# Altium PCB Mach_in.PcbDoc
Units mm, origin at the board's own origin, x right, y up, seen from the top; angles counter-clockwise.
Board outline 169.93 x 104.19 mm, 2 copper layers (Top Layer, Bottom Layer); 38 components, 29 nets, 150 pads, 8 vias.
Unrouted connection lines stored in the file: 5.
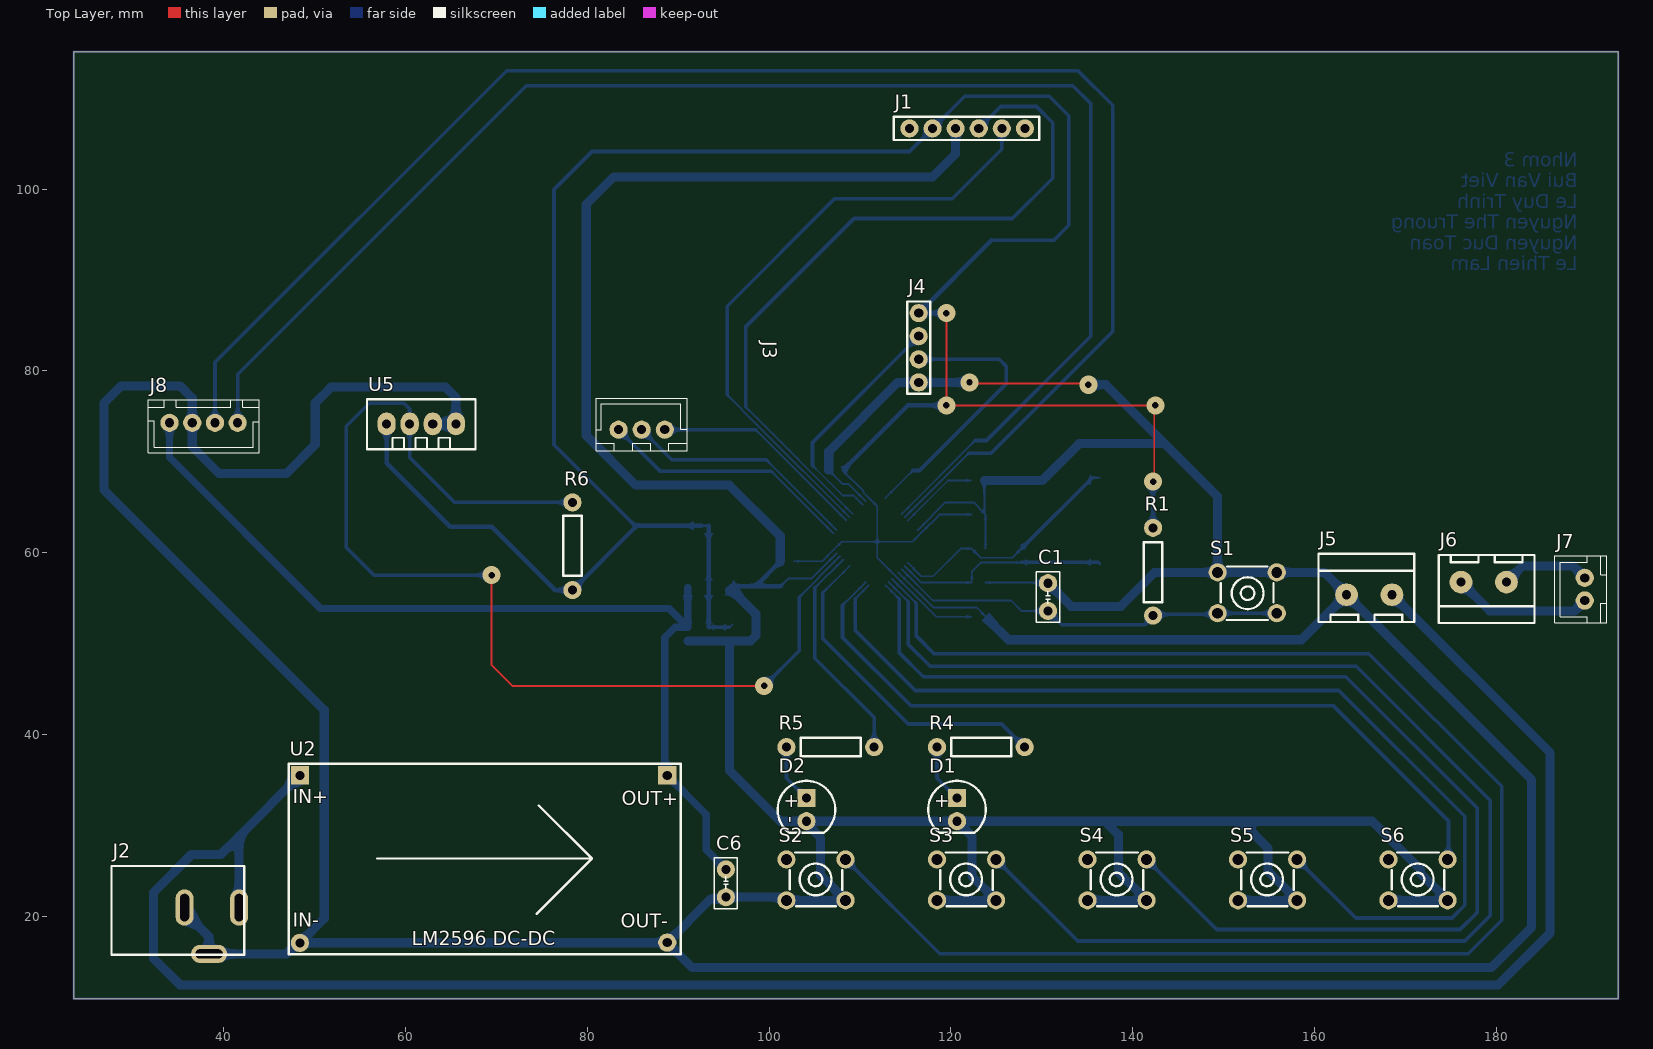
[diagram p0: Top Layer view]
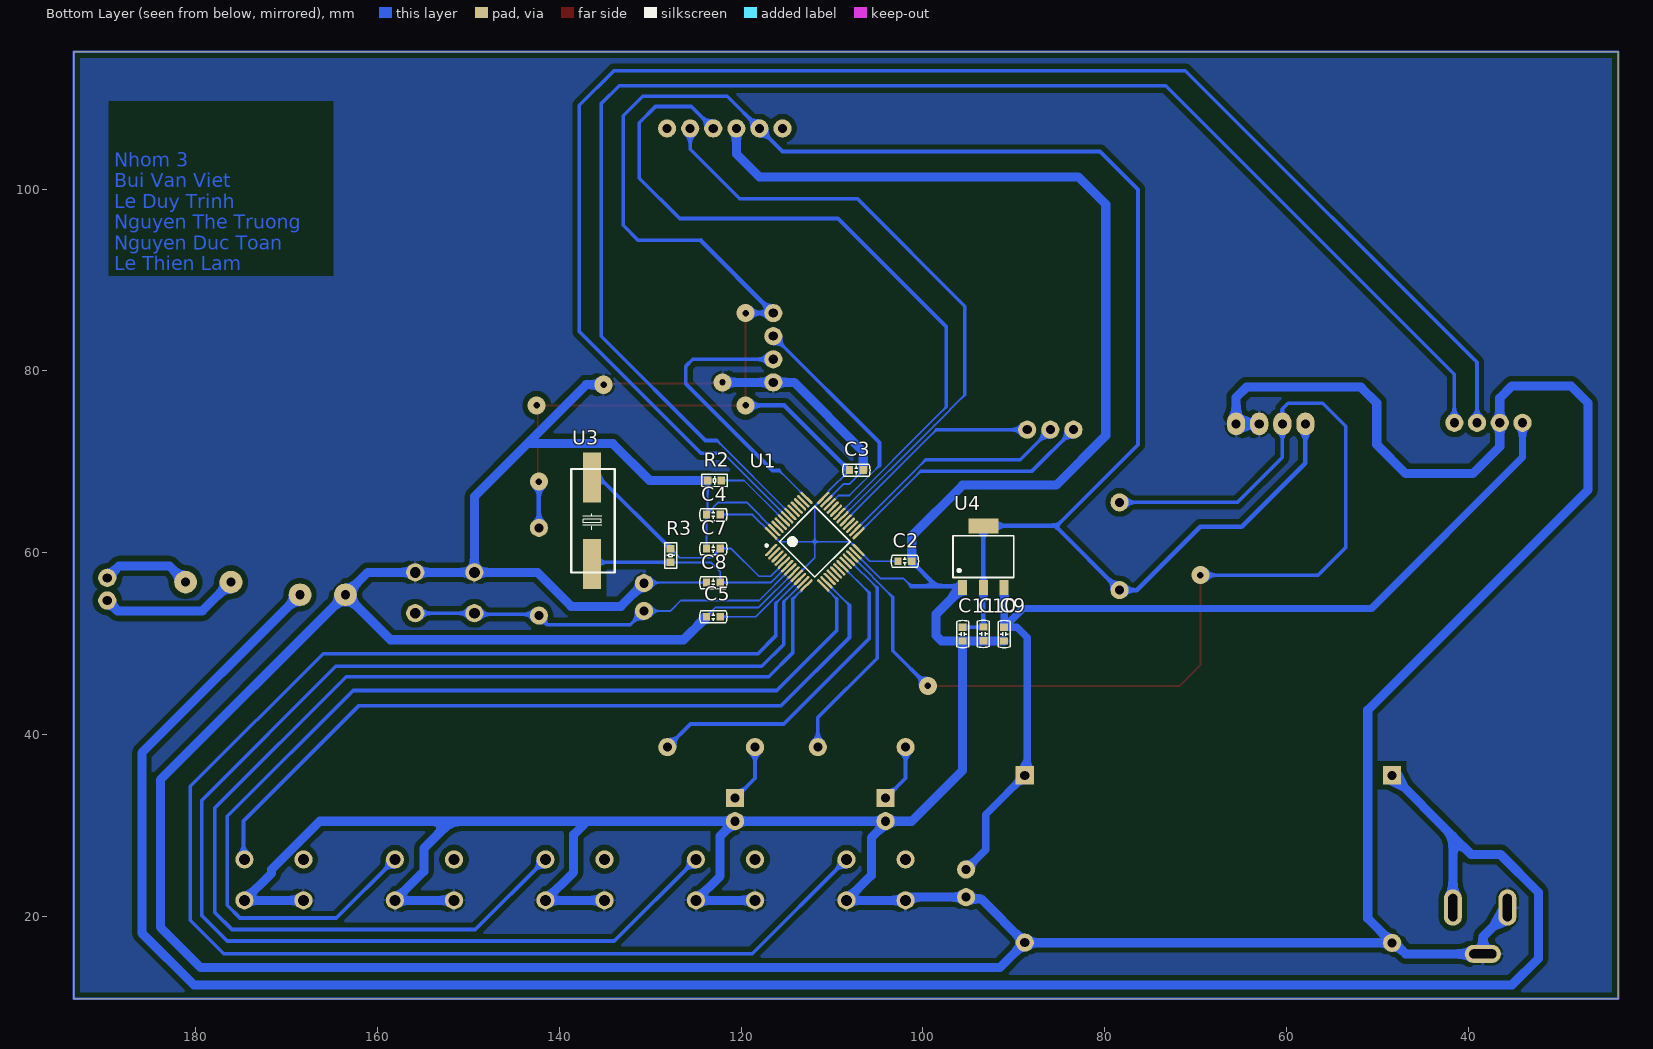
[diagram p1: Bottom Layer view, seen from below]
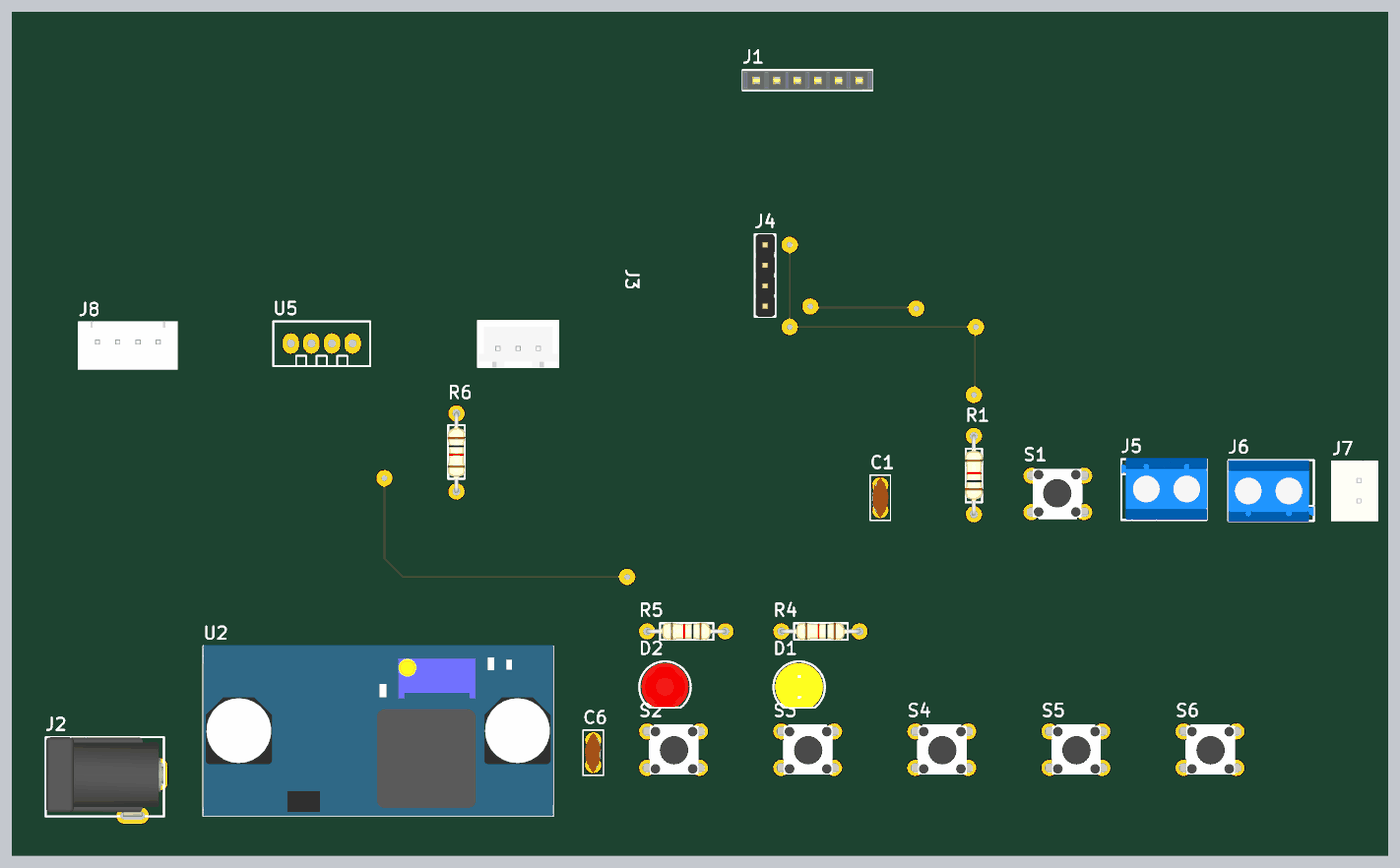
[diagram p2: 3D render of the assembled board from above, using the file's embedded part models]
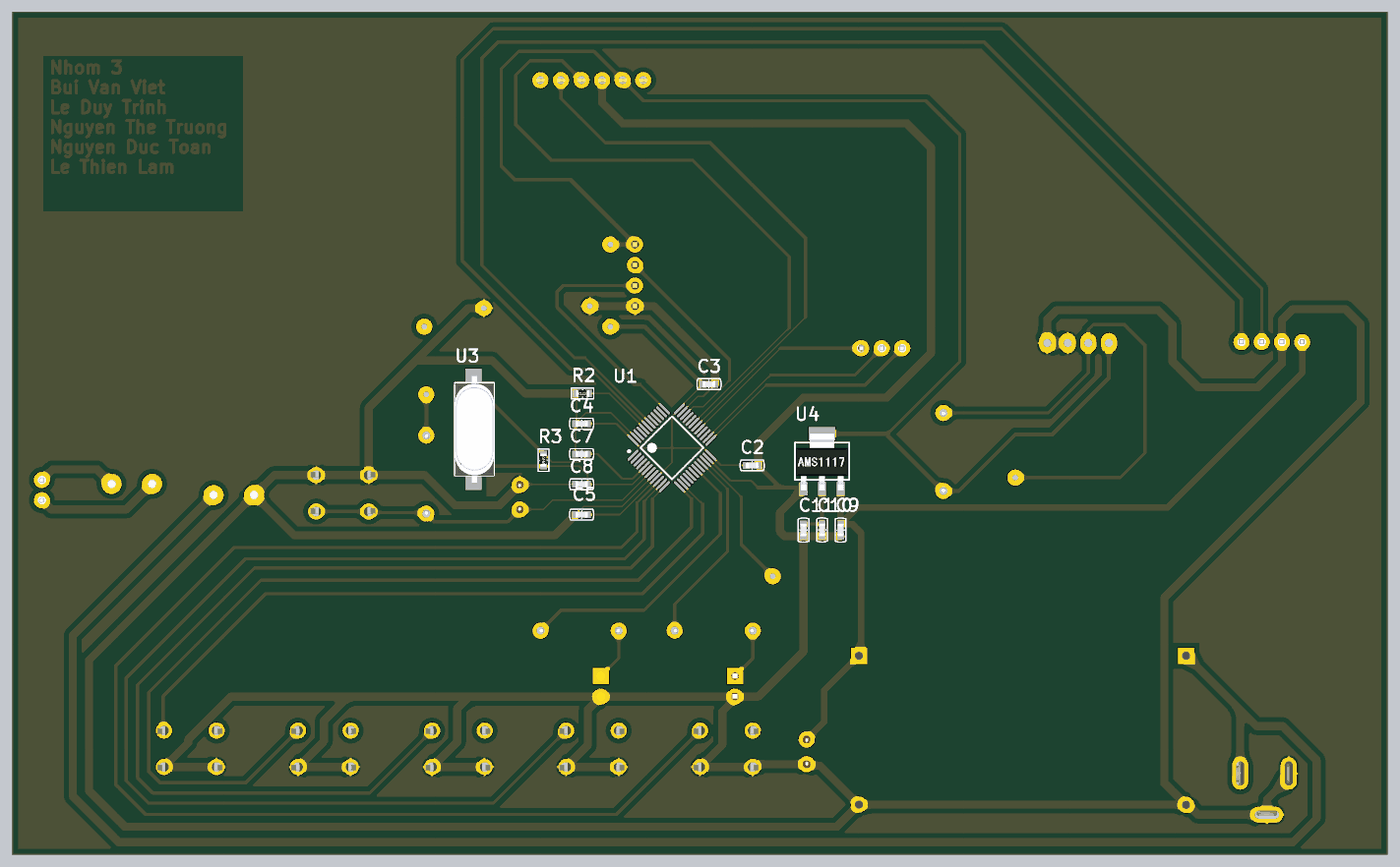
[diagram p3: 3D render of the assembled board from below, using the file's embedded part models]

## Layer stack, top to bottom
Top Solder: solder mask 0.0102, Solder Resist, Dk 3.5
Top Layer: signal copper 0.0356
Dielectric 1: dielectric 0.32, FR-4, Dk 4.8
Bottom Layer: signal copper 0.0356
Bottom Solder: solder mask 0.0102, Solder Resist, Dk 3.5

## Board outline
23.495,10.922 23.495,115.113 193.421,115.113 193.421,10.922

## Design rules (kind name [scope] priority, off if disabled: settings)
Clearance [All] p1: gap=0.2 ignorepadtopadclearanceinfootprint=FALSE
PolygonConnect [All] p1: connectstyle=Relief reliefconductorwidth=0.254 reliefentries=4 polygonreliefangle="90 Angle" airgapwidth=0.254
RoutingLayers [All] p1: top layer_v5=FALSE bottom layer_v5=TRUE
RoutingVias [All] p1: holewidth=0.711 width=1.27 viastyle="Through Hole" minholewidth=0.711 minwidth=1.27 maxholewidth=0.711 maxwidth=1.27
SolderMaskExpansion [All] p1: expansion=0.102 istentingtop=FALSE
SupplyNets "Schematic Supply Nets_3" [InNet('+5')] p1: voltage=0.000
SupplyNets "Schematic Supply Nets_2" [InNet('+12')] p2: voltage=0.000
SupplyNets "Schematic Supply Nets_1" [InNet('GND')] p3: voltage=0.000
SupplyNets "Schematic Supply Nets" [InNet('3.3V')] p4: voltage=0.000
Width GND [InNet('GND')] p1: maxlimit=1 minlimit=0.2 preferedwidth=0.2
Width 12V [InNet('+12')] p2: maxlimit=1 minlimit=1 preferedwidth=1
Width 5V [InNet('+5')] p3: maxlimit=0.8 minlimit=0.8 preferedwidth=0.8
Width 3.3V [InNet('3.3V')] p4: maxlimit=0.5 minlimit=0.2 preferedwidth=0.2
Width NET [All] p5: maxlimit=0.4 minlimit=0.2 preferedwidth=0.2
29 further rules are at their usual default settings.

## Components (designator, comment, footprint, x,y, rotation, side; value= is the part's Value field where it differs from the comment)
C1 "CAPCITOR 104" "CAPACITOR 104" 130.683,55.118 r180 top
C2 "CAPACITOR 0603" "CAPACITOR 0603" 101.981,59.055 r0 bottom
C3 "CAPACITOR 0603" "CAPACITOR 0603" 107.315,69.088 r0 bottom
C4 "CAPACITOR 0603" "CAPACITOR 0603" 123.047,64.199 r180 bottom
C5 "CAPACITOR 0603" "CAPACITOR 0603" 123.047,52.959 r180 bottom
C6 "CAPCITOR 104" "CAPACITOR 104" 95.25,23.622 r0 top
C7 "CAPACITOR 0603" "CAPACITOR 0603" 123.047,60.452 r180 bottom
C8 "CAPACITOR 0603" "CAPACITOR 0603" 123.047,56.705 r180 bottom
C9 "CAPACITOR 0603" "CAPACITOR 0603" 91.059,51.045 r90 bottom
C10 "CAPACITOR 0603" "CAPACITOR 0603" 93.345,51.063 r90 bottom
C11 "CAPACITOR 0603" "CAPACITOR 0603" 95.631,51.045 r90 bottom
D1 "LED_5mm_YELLOW" LED_5mm_YELLOW 120.667,31.725 r270 top
D2 "LED_5mm_RED" LED_5mm_RED 104.106,31.725 r270 top
J1 "HM-10" FEMALE-2.54-6P 121.793,106.68 r270 top
J2 "JACK_P4" JACK_P4 34.94,20.638 r180 top
J3 "L298N_A" JST-2.54-3P 85.979,74.106 r270 top
J4 "SWD" MALE-2.54-4P 116.459,82.55 r180 top
J5 "L298N_B" BORNE-5.00-2P 165.708,56.126 r270 top
J6 "BORNE-5.00-2P" BORNE-5.00-2P 178.943,56.007 r90 top
J7 "JST-2.54-2P" JST-2.54-2P 189.279,55.967 r0 top
J8 "LCD16x2 I2C" JST-2.54-4P 37.789,73.91 r90 top
R1 "RESISTOR_9.5mm" RESISTOR_PTH_9.5mm 142.24,57.912 r90 top
R2 "RESISTOR_0603" RESISTOR_0603 122.927,67.945 r180 bottom
R3 "RESISTOR_0603" RESISTOR_0603 127.762,59.69 r90 bottom
R4 "RESISTOR_9.5mm" RESISTOR_PTH_9.5mm 123.293,38.608 r180 top
R5 "RESISTOR_9.5mm" RESISTOR_PTH_9.5mm 106.732,38.608 r180 top
R6 "RESISTOR_9.5mm" RESISTOR_PTH_9.5mm 78.359,60.706 r270 top
S1 "PUSH_BUTTON_6X6" PUSH_BUTTON_6X6 152.602,55.59 r180 top
S2 "PUSH_BUTTON_6X6" PUSH_BUTTON_6X6 105.156,24.003 r0 top
S3 "PUSH_BUTTON_6X6" PUSH_BUTTON_6X6 121.716,24.003 r0 top
S4 "PUSH_BUTTON_6X6" PUSH_BUTTON_6X6 138.277,24.003 r0 top
S5 "PUSH_BUTTON_6X6" PUSH_BUTTON_6X6 154.837,24.003 r0 top
S6 "PUSH_BUTTON_6X6" PUSH_BUTTON_6X6 171.398,24.003 r0 top
U1 "STM32F103C8T6" STM-LQFP48_N 111.887,61.214 r135 bottom
U2 "MODULE_LM2596" MODULE_LM2596 68.58,26.289 r0 top
U3 "CRISTAL_16Mhz" CRISTAL_16Mhz_SMD 136.398,63.5 r90 bottom
U4 "AMS1117" AMS1117 93.345,59.563 r90 bottom
U5 "DHT11" DHT11 61.722,74.168 r270 top

## Footprints (in the part's own frame and the unit in brackets; to place one, negate y for a bottom-side part, rotate by r counter-clockwise, add the part's x,y. Pads: shape width x height; smd on the part's side, far side on the other; paste and mask are expansions set on the pad)
AMS1117 [mm] "SOT-223"
  rect 1.65x1 smd: 1(-3.4,2.29) 2(-3.4,0) 3(-3.4,-2.29)
  rect 1.65x3.3 smd: 2(3.4,0)
  silkscreen extent -2.3,-3.35 2.3,3.35, body extent -3.6,-3.25 3.4,3.25, height 1.87
BORNE-5.00-2P [mm]
  round 2.5 hole 1: 1(0.754,2.821) 2(0.754,-2.18)
  silkscreen extent -3.75,-5.27 3.75,5.27, body extent -3.86,-5.28 3.74,5.32, height 10.1
"CAPACITOR 104" [mm]
  round 2 hole 1: 1(0,-1.524) 2(0,1.524)
  silkscreen extent -1.27,-2.79 1.27,2.79, body extent -1.02,-2.5 1.02,2.5, height 5.5
"CAPACITOR 0603" [mm]
  rect 0.806x0.864 smd: 1(-0.753,0) 2(0.753,0)
  silkscreen extent -1.5,-0.66 1.5,0.66, body extent -0.79,-0.4 0.81,0.4, height 0.81
CRISTAL_16Mhz_SMD [mm]
  rect 5.5x2 smd: 1(-4.75,0) 2(4.75,0)
  silkscreen extent -5.68,-2.5 5.72,2.3, body extent -6.61,-2.52 6.59,2.28, height 4.3
DHT11 [mm] "SENSOR HUMIDITY/TEMPERATURE"
  oval 2.5x2 hole 1: 1(0,-3.81) 2(0,-1.27) 3(0,1.27) 4(0,3.81)
  silkscreen extent -2.71,-5.97 2.79,5.97, body extent -2.71,-6 2.79,6, height 15.5
FEMALE-2.54-6P [mm]
  round 2 hole 1: 1(0,-6.35) 2(0,-3.81) 3(0,-1.27) 4(0,1.27) 5(0,3.81) 6(0,6.35)
  silkscreen extent -1.27,-8.08 1.27,7.93, body extent -1.19,-8.13 1.21,7.97, height 8.3
JACK_P4 [mm]
  oval 2x4 hole 1 slot 3 at 90 deg: 1(-6.746,-0.317) 2(-0.747,-0.317)
  oval 4x2 hole 1 slot 3 at 0 deg: 3(-3.447,4.783)
  silkscreen extent -7.3,-4.89 7.3,4.89, body extent -7.27,-4.92 7.23,4.88, height 11.38
JST-2.54-2P [mm]
  round 2 hole 1: 1(0.459,1.27) 2(0.459,-1.23)
  silkscreen extent -2.87,-3.68 2.87,3.68, body extent -2.87,-3.68 2.88,3.72, height 7.05
JST-2.54-3P [mm]
  round 2 hole 1: 1(0.573,2.54) 2(0.573,0) 3(0.573,-2.54)
  silkscreen extent -2.9,-5 2.9,5, body extent -2.85,-4.95 2.9,4.95, height 7.02
JST-2.54-4P [mm]
  round 2 hole 1: 1(0.385,3.76) 2(0.385,1.26) 3(0.385,-1.24) 4(0.385,-3.74)
  silkscreen extent -2.92,-6.1 2.92,6.1, body extent -2.92,-6.09 2.92,6.09, height 7.21
LED_5mm_RED [mm]
  rect 2x2 hole 1: 1(-1.27,0)
  round 2 hole 1: 2(1.27,0)
  silkscreen extent -3.17,-3.17 2.54,3.17, body extent -2.94,-2.9 2.45,2.9, height 8.72
LED_5mm_YELLOW [mm]
  rect 2x2 hole 1: 1(-1.27,0)
  round 2 hole 1: 2(1.27,0)
  silkscreen extent -3.17,-3.17 2.54,3.17, body extent -2.97,-2.96 2.48,2.94, height 8.65
MALE-2.54-4P [mm]
  round 2 hole 1: 1(0,-3.81) 2(0,-1.27) 3(0,1.27) 4(0,3.81)
  silkscreen extent -1.27,-5.08 1.27,5.07, body extent -1.21,-5.09 1.19,5.07, height 8.36
MODULE_LM2596 [mm] "MODULE BUCK STEP DOWN 3A 43x20mm"
  round 2 hole 1: 1(20.21,-9.185) 4(-20.21,-9.215)
  rect 2x2 hole 1: 2(20.21,9.215) 3(-20.21,9.215)
  silkscreen extent -21.45,-10.47 21.7,10.49, body extent -21.49,-10.49 21.71,10.61, height 13.15
PUSH_BUTTON_6X6 [mm]
  round 2 hole 1.2: 1(-3.25,-2.25) 1(3.25,-2.25) 2(-3.25,2.25) 2(3.25,2.25)
  silkscreen extent -2.9,-2.9 2.9,3, body extent -3.94,-3.07 4.07,2.93, height 6.8
RESISTOR_0603 [mm]
  rect 0.806x0.864 smd: 1(-0.753,0) 2(0.753,0)
  silkscreen extent -1.39,-0.66 1.38,0.66, body extent -0.79,-0.4 0.81,0.4, height 0.47
RESISTOR_PTH_9.5mm [mm]
  round 2 hole 1: 1(-4.826,0) 2(4.826,0)
  silkscreen extent -3.36,-1.02 3.24,1.02, body extent -5,-1.11 5,1.11, height 2.61
STM-LQFP48_N [mm] "QFP, 48-Leads, Body 7x7mm, Pitch 0.5mm, IPC Medium Density"
  oval 1.8x0.3 smd: 1(-4.05,2.75) 2(-4.05,2.25) 3(-4.05,1.75) 4(-4.05,1.25) 5(-4.05,0.75) 6(-4.05,0.25) 7(-4.05,-0.25) 8(-4.05,-0.75) 9(-4.05,-1.25) 10(-4.05,-1.75) 11(-4.05,-2.25) 12(-4.05,-2.75) 25(4.05,-2.75) 26(4.05,-2.25) 27(4.05,-1.75) 28(4.05,-1.25) 29(4.05,-0.75) 30(4.05,-0.25) 31(4.05,0.25) 32(4.05,0.75) 33(4.05,1.25) 34(4.05,1.75) 35(4.05,2.25) 36(4.05,2.75)
  oval 0.3x1.8 smd: 13(-2.75,-4.05) 14(-2.25,-4.05) 15(-1.75,-4.05) 16(-1.25,-4.05) 17(-0.75,-4.05) 18(-0.25,-4.05) 19(0.25,-4.05) 20(0.75,-4.05) 21(1.25,-4.05) 22(1.75,-4.05) 23(2.25,-4.05) 24(2.75,-4.05) 37(2.75,4.05) 38(2.25,4.05) 39(1.75,4.05) 40(1.25,4.05) 41(0.75,4.05) 42(0.25,4.05) 43(-0.25,4.05) 44(-0.75,4.05) 45(-1.25,4.05) 46(-1.75,4.05) 47(-2.25,4.05) 48(-2.75,4.05)
  silkscreen extent -4.17,-2.75 2.75,3.57, body extent -3.5,-3.5 3.5,3.5, height 1.6

## Part data
C1 C6: library part "CAPACITOR 104", "Ceramic Capacitor 104, 3mm."
C2 C3 C4 C5 C7 C8 C9 C10 C11: "Generic Capacitor 0603, 1.6x0.8x0.9mm."
D1: "LED PTH 5mm Yellow."
D2: "LED PTH 5mm Red."
J1: library part FEMALE-2.54-6P, "Female Header Connector 2.54mm 6 Pins.", JLCPCB PN=C5224026
J2: "9V Battery Connector Jack P4."
J3: library part JST-2.54-3P, "Female Connector JST 3 Vias, 2.54mm."
J4: library part MALE-2.54-4P, "Male Header Connector 2.54mm 4 Pins.", JLCPCB PN=C492403
J5: library part BORNE-5.00-2P, "Borne 2 Vias, Pitch 5mm.", JLCPCB PN=C91153
J6: "Borne 2 Vias, Pitch 5mm.", JLCPCB PN=C91153
J7: "Female Connector JST 2 Vias, 2.54mm."
J8: library part JST-2.54-4P, "Female Connector JST 4 Vias, 2.54mm."
R1 R4 R5 R6: "Generic Resistor 9.5mm."
R2 R3: "Generic Resistor 0603."
S1 S2 S3 S4 S5 S6: "Push Button Tactile Switch PTH 4 Pins 6x6mm.", JLCPCB PN=C255811
U1: "ARM Cortex-M3 32-bit MCU, 64 KB Flash, 20 KB Internal RAM, 37 I/Os, 48-pin LQFP, -40 to 85 degC, Tray", I/Os (High Current)=37, Operating Frequency(F) (Processor speed) (MHz)=72, Supplier Part Number 1=497-6063-ND, Supply Voltage(Vcc) min (V)=2, A/D Converter="2x12-bit (10 Channel)", ComponentLink1Description="Manufacturer URL", ComponentLink1URL=http://www.st.com/web/en/home.html, ComponentLink2Description=Datasheet, ComponentLink2URL=http://www.st.com/st-web-ui/static/active/en/resource/technical/document/datasheet/CD00161566.pdf, ComponentLink3Description="Package Specification", ComponentLink3URL=http://www.st.com/st-web-ui/static/active/en/resource/technical/document/datasheet/DM00058181.pdf, Core="ARM Cortex-M3", DatasheetVersion="Rev. 16", FLASH Size (Prog) (kB)=64, Internal RAM Size (kB)=20, Mounting Technology="Surface Mount", PackageDescription="48-Pin Low Profile Quad Flat Package, 7 x 7 mm Body, 0.5 mm Pitch", PackageReference=LQFP48, PackageVersion="Rev. 6, 06/2013", Packing=Tray, PartNumber=STM32F103C8T6, Supplier 1=Digi-Key, Supplier 2=Farnell, Supplier 3=Newark, Supplier 4=Newark, Supplier 5=Mouser, Supplier Part Number 2=1447637, Supplier Part Number 3=59M2182, Supplier Part Number 4=57P1222, Supplier Part Number 5=511-STM32F103C8T6
U2: "MODULE BUCK STEP DOWN 3A 43x20mm", ComponentLink1Description=Datasheet, ComponentLink1URL=https://www.ti.com/lit/ds/symlink/lm2596.pdf
U3: "CRYSTAL 16MHZ, PTH and SMD", Digikey PN=3155-16M20P2/49US-ND, Mouser PN=449-LFXTAL022786BULK
U4: "IC REG LINEAR 1A SOT-89-3L", JLCPCB PN=C963410, ComponentLink1Description=Datasheet, ComponentLink1URL=http://www.advanced-monolithic.com/pdf/ds1117.pdf, Digikey PN=4518-AMS1117-3.3CT-ND
U5: "SENSOR HUMIDITY/TEMPERATURE", Digikey PN=1528-1228-ND

## Via types
v1: diameter 2, hole 0.711, Top Layer to Bottom Layer, 8 vias

## Nets (pads, with @x,y where several pads share a name; then routed paths per layer and width w, separated by ;. In a path a pad name is that pad's centre, name@x,y a point inside that pad or via, vN(x,y) a via of type N, cw(c..) or ccw(c..) an arc to the next point about the centre after c; other vN are vias at no path point)
3.3V: C2.2 C3.2 C4.2 C5.2 C10.2 C11.2 J1.2 J4.1 R1.2 R6.2 U1.9 U1.24 U1.36 U1.48 U4.2 U5.1 | length 307.6
  Top Layer w0.2: v1(119.507,86.36) v1(119.507,76.2) 142.085,76.2 v1@142.289,75.995 ; v1(142.24,67.818) 142.367,67.945 142.367,75.946 142.303,76.01 v1(142.494,76.2)
  Bottom Layer w0.2: U4.2@92.52,62.963 U4.2@93.345,62.963 ; C11.2@95.613,51.816 C11.2 95.66,51.798 C11.2@95.963,52.101 ; C2.2 105.839,59.055 U1.24 ; U1.24@107.075,60.291 U1.24 ; C3.2@108.458,69.42 108.371,69.42 108.068,69.117 C3.2 108.068,69.059 110.388,66.739 110.388,66.673 110.418,66.642 110.418,66.572 U1.36 111.887,65.103 111.887,61.214 ; C5.2 118.374,52.959 U1.9 111.887,59.446 111.887,61.214 ; C4.2 118.761,64.199 U1.48 115.776,61.214 111.887,61.214 ; U1.24 107.998,61.214 111.887,61.214
  Bottom Layer w0.4: 85.246,62.963 76.327,71.882 76.327,99.949 80.518,104.14 115.443,104.14 J1.2 121.539,110.236 130.81,110.236 132.969,108.077 132.969,96.012 131.318,94.361 124.46,94.361 ; C10.2 C11.2@95.613,51.816
  Bottom Layer w0.5: U5.1 57.912,69.85 64.897,62.865 69.469,62.865 76.454,55.88 R6.2 85.246,62.767 85.246,62.963 86.77,62.963 U4.2@92.52,62.963 ; C10.2 93.345,56.163 U4.2@93.345,62.963 ; C3.2@108.458,69.42 115.238,76.2 v1(119.507,76.2) ; v1(119.507,86.36) J4.1 124.46,94.361 ; R1.2 v1(142.24,67.818)
+5: C6.2 C9.2 J8.1 U2.2 U4.3 | length 104.3
  Bottom Layer w0.8: J8.1 34.029,70.492 50.673,53.848 89.009,53.848 C9.2@91.055,51.802 ; U4.3 C9.2@91.055,51.802 ; C6.2 93.091,27.305 93.091,31.203 88.519,35.775 88.519,50.673 89.644,51.798 C9.2 C9.2@91.055,51.802
+12: J2.1 J5.1 U2.3 | length 238.2
  Bottom Layer w1: J2.1 41.687,28.821 ; U2.3 41.687,28.821 ; J5.1 185.928,37.973 185.928,18.161 180.213,12.446 35.179,12.446 32.258,15.367 32.258,22.606 36.449,26.797 39.663,26.797 41.687,28.821
Boot0: R2.2 U1.44 | length 8.7
  Bottom Layer w0.2: U1.44 119.679,67.945 R2.2
"Button 1": S2.2 U1.10 | length 171.4
  Bottom Layer w0.2: U1.10 116.205,54.421
  Bottom Layer w0.4: S2.2@108.406,26.253 118.784,15.875 176.911,15.875 180.594,19.558 180.594,34.29 165.989,48.895 118.145,48.895 116.205,50.835 116.205,54.421
"Button 2": S3.2 U1.11 | length 150.8
  Bottom Layer w0.2: U1.11 115.316,54.603
  Bottom Layer w0.4: 115.316,54.603 115.316,49.911 117.729,47.498 164.592,47.498 179.324,32.766 179.324,20.066 176.53,17.272 133.947,17.272 S3.2@124.966,26.253
"Button 3": S4.2 U1.12 | length 130.5
  Bottom Layer w0.2: U1.12 114.3,54.912
  Bottom Layer w0.4: 114.3,54.912 114.3,49.022 116.967,46.355 163.449,46.355 177.927,31.877 177.927,20.447 176.022,18.542 149.238,18.542 S4.2@141.527,26.253
"Button 4": S5.2 U1.13 | length 112.6
  Bottom Layer w0.2: 109.474,54.912 U1.13
  Bottom Layer w0.4: 109.474,54.912 109.474,51.435 116.078,44.831 162.687,44.831 176.53,30.988 176.53,21.209 175.133,19.812 164.528,19.812 S5.2@158.087,26.253
"Button 5": S6.2 U1.14 | length 86.5
  Bottom Layer w0.2: 108.077,54.229 110.607,56.759 U1.14
  Bottom Layer w0.4: 108.077,54.229 108.077,50.673 115.57,43.18 162.052,43.18 174.752,30.48 174.752,26.357 S6.2@174.648,26.253
CD1: R5.1 U1.21 | length 24.6
  Bottom Layer w0.2: 105.029,56.124 U1.21
  Bottom Layer w0.4: 105.029,56.124 105.029,48.387 111.558,41.858 R5.1
CD2: R4.1 U1.19 | length 36.3
  Bottom Layer w0.2: 105.918,55.599 U1.19
  Bottom Layer w0.4: 105.918,55.599 105.918,50.546 115.316,41.148 125.579,41.148 R4.1
DATA_DHT11: R6.1 U1.22 U5.2 | length 122.7
  Top Layer w0.2: v1(69.469,57.531) 69.469,47.625 71.755,45.339 v1(99.441,45.339)
  Bottom Layer w0.2: U5.2 U5.2@60.452,74.418 ; 103.316,55.118 U1.22
  Bottom Layer w0.4: U5.2 60.452,70.485 65.405,65.532 R6.1 ; U5.2@60.452,74.418 60.452,75.819 59.817,76.454 56.007,76.454 53.467,73.914 53.467,60.579 56.515,57.531 v1(69.469,57.531) ; v1(99.441,45.339) 103.316,49.214 103.316,55.118
GND: C1.1 C2.1 C3.1 C4.1 C5.1 C6.1 C7.1 C8.1 C9.1 C10.1 C11.1 D1.2 D2.2 J1.3 J2.2 J2.3 J4.4 J5.2 J8.2 R2.1 S1.1 S2.1 S3.1 S4.1 S5.1 S6.1 U1.8 U1.23 U1.35 U1.47 U2.1 U2.4 U4.1 U5.3 U5.4 | length 854.2
  Top Layer w0.2: v1(122.047,78.74) 122.174,78.613 135.001,78.613 v1(135.128,78.486)
  Bottom Layer w0.2: U2.4 U2.4@48.385,17.089 ; 51.699,78.115 51.816,78.232 ; U4.1 U4.1@95.78,56.308 ; C2.1@101.228,59.026 C2.1 ; 101.266,56.308 102.108,57.15 104.641,57.15 U1.23 ; C3.1@106.562,69.117 C3.1 106.562,69.059 108.057,67.564 108.719,67.564 U1.35 ; U1.8 118.065,53.975 122.813,53.975 123.8,52.988 C5.1 123.8,52.93 124.103,52.627 C5.1@124.132,52.627 ; J4.4@116.185,78.74 J4.4 ; U1.47 119.387,65.532 122.495,65.532 C4.1@123.68,64.347 ; R2.1 C4.1@123.68,64.347 ; C8.1 C1.1@130.683,56.705 ; C7.1 C4.1 123.8,64.228 C4.1@123.68,64.347 ; 143.51,72.009 143.573,71.945
  Bottom Layer w0.5: U4.1@95.78,56.308 98.51,56.308 ; C2.1@101.228,59.026 98.51,56.308 ; 101.266,56.308 98.51,56.308
  Bottom Layer w1: J2.2 35.687,20.226 36.149,19.764 36.37,19.764 38.365,17.769 38.365,15.877 J2.3 46.88,15.855 48.099,17.074 U2.4 ; 51.699,78.115 50.058,76.474 50.058,71.902 46.863,68.707 39.497,68.707 36.529,71.675 J8.2 36.529,77.009 35.179,78.359 28.702,78.359 26.797,76.454 26.797,66.929 51.054,42.672 51.054,19.758 48.385,17.089 88.775,17.089 U2.1 ; 51.816,78.232 64.389,78.232 65.532,77.089 U5.4 U5.3 ; C9.1 C11.1 ; U4.1@95.635,55.838 95.96,55.838 98.541,53.257 98.541,50.878 97.955,50.292 C11.1 ; C2.1 101.228,61.84 95.631,67.437 85.344,67.437 79.883,72.898 79.883,98.317 82.912,101.346 117.983,101.346 120.523,103.886 J1.3 ; C3.1@106.562,69.117 106.562,71.129 114.173,78.74 J4.4@116.185,78.74 ; J4.4 v1(122.047,78.74) ; S3.1@118.467,21.753 124.966,21.753 122.301,24.418 122.301,28.829 D1.2@120.675,30.455 ; R2.1 130.048,67.945 134.112,72.009 143.51,72.009 137.033,78.486 v1(135.128,78.486) ; C5.1@124.132,52.627 126.34,50.419 158.576,50.419 J5.2 ; C1.1 133.223,54.102 138.684,54.102 142.422,57.84 S1.1@149.352,57.84 ; S4.1@135.027,21.753 141.527,21.753 138.43,24.85 138.43,28.982 137.227,30.185 137.227,30.455 ; 143.573,71.945 149.352,66.167 S1.1@149.352,57.84 ; S5.1@151.588,21.753 158.087,21.753 154.894,24.946 154.894,27.453 151.892,30.455 ; S6.1@168.148,21.753 174.648,21.753 171.654,24.747 171.654,25.151 166.35,30.455 151.892,30.455 ; U2.1 91.543,14.351 179.451,14.351 183.896,18.796 183.896,35.005 J5.2 ; U2.1 93.593,21.907 95.059,21.907 C6.1 101.291,22.098 101.635,21.753 101.906,21.753 108.406,21.753 105.664,24.495 105.664,28.627 104.106,30.185 D2.2 ; C11.1 95.631,36.068 101.244,30.455 D2.2 ; D2.2 D1.2 D1.2@120.675,30.455 ; D1.2@120.675,30.455 137.227,30.455 ; 137.227,30.455 151.892,30.455 ; S1.1@149.352,57.84 155.852,57.84 161.061,57.84 J5.2
IN1: J3.2 U1.26 | length 26
  Bottom Layer w0.2: 99.688,70.231 U1.26
  Bottom Layer w0.4: J3.2 89.281,70.231 99.688,70.231
IN2: J3.3 U1.25 | length 28.4
  Bottom Layer w0.2: 100.232,68.98 U1.25
  Bottom Layer w0.4: J3.3 87.992,68.98 100.232,68.98
NetD1_1: D1.1 R4.2 | length 6.5
  Bottom Layer w0.4: R4.2 118.467,35.196 D1.1
NetD2_1: D2.1 R5.2 | length 6.5
  Bottom Layer w0.4: R5.2 101.906,35.196 D2.1
NetJ6_1: J6.1 J7.2 | length 15.4
  Bottom Layer w1: J6.1 179.289,53.594 188.595,53.594 J7.2
NetJ6_2: J6.2 J7.1 | length 9.9
  Bottom Layer w1: J6.2 182.909,58.547 188.428,58.547 J7.1
OSC_IN: C7.2 R3.2 U1.5 U3.2 | length 27.1
  Bottom Layer w0.2: U1.5 116.758,57.404 118.028,57.404 121.076,60.452 C7.2 122.294,60.423 123.281,59.436 126.726,59.436 127.733,60.443 R3.2@127.791,60.443 ; U3.2@135.573,68.25 U3.2
  Bottom Layer w0.4: R3.2@127.766,60.443 127.791,60.443 127.994,60.646 127.994,60.671 U3.2@135.573,68.25
OSC_OUT: C8.2 R3.1 U1.6 U3.1 | length 23.9
  Bottom Layer w0.2: U1.6 116.749,56.705 C8.2 122.294,57.905 123.317,58.928 127.753,58.928 R3.1 ; U3.1@136.211,58.937 U3.1
  Bottom Layer w0.4: R3.1 U3.1@136.211,58.937
PWM: J3.1 U1.29 | length 24.1
  Bottom Layer w0.2: 98.507,73.533 U1.29
  Bottom Layer w0.4: J3.1 98.507,73.533
Reset: C1.2 R1.1 S1.2 U1.7 | length 44.6
  Bottom Layer w0.2: U1.7 118.01,54.737 126.619,54.737 127.762,53.594 C1.2 ; R1.1@142.24,52.705 R1.1 R1.1@142.367,53.213 ; S1.2@149.225,53.213 S1.2@149.352,53.34
  Bottom Layer w0.4: C1.2 132.207,52.07 141.325,52.07 141.96,52.705 R1.1@142.24,52.705 ; R1.1@142.367,53.213 S1.2@149.225,53.213 ; S1.2@149.352,53.34 S1.2@155.852,53.34
RX_HM10: J1.5 U1.30 | length 68.5
  Bottom Layer w0.2: 95.377,77.37 98.714,74.033 U1.30
  Bottom Layer w0.4: 95.377,77.37 95.377,87.122 107.188,98.933 120.142,98.933 125.603,104.394 J1.5
SCL_LCD: J8.4 U1.42 | length 167.7
  Bottom Layer w0.2: U1.42 122.67,72.351
  Bottom Layer w0.4: J8.4 41.529,79.629 73.279,111.379 133.419,111.379 135.382,109.416 135.382,83.82 123.913,72.351 122.67,72.351
SDA_LCD: J8.3 U1.43 | length 176.5
  Bottom Layer w0.2: U1.43 121.982,70.956
  Bottom Layer w0.4: J8.3 39.029,80.939 71.12,113.03 133.985,113.03 137.795,109.22 137.795,84.328 124.423,70.956 121.982,70.956
SWCLK: J4.3 U1.37 | length 30.4
  Bottom Layer w0.2: U1.37 115.824,69.04
  Bottom Layer w0.4: 115.824,69.04 116.547,69.04 126.071,78.564 126.071,80.533 125.324,81.28 J4.3
SWDIO: J4.2 U1.34 | length 26.3
  Bottom Layer w0.2: 104.775,69.596 108.077,66.294 109.282,66.294 U1.34
  Bottom Layer w0.4: 104.775,69.596 104.775,72.136 J4.2
TX_HM10: J1.4 U1.31 | length 82
  Bottom Layer w0.2: 97.409,76.046 U1.31
  Bottom Layer w0.4: 97.409,76.046 97.409,84.836 109.347,96.774 126.756,96.774 131.191,101.209 131.191,107.315 129.413,109.093 125.476,109.093 J1.4
pads on no net: J1.1 J1.6 U1.1 U1.2 U1.3 U1.4 U1.15 U1.16 U1.17 U1.18 U1.20 U1.27 U1.28 U1.32 U1.33 U1.38 U1.39 U1.40 U1.41 U1.45 U1.46
copper on no net: | length 548.2
  Bottom Layer w0.254: 23.495,10.922 193.421,10.922 193.421,115.113 23.495,115.113 23.495,10.922

## Polygon pours and split planes (outlines as drawn)
GND on Bottom Layer "GND_L02_P000" (solid, remove dead copper, pour order 0): 193.421,115.113 23.495,115.113 23.495,10.922 193.421,10.922

## Other copper
Bottom Layer:
  text "Nhom 3 / Bui Van Viet / Le Duy Trinh / Nguyen The Truong / Nguyen Duc Toan / Le Thien Lam" at 188.976,91.059 h1.52

## Text inside footprints (layer, text, board x,y; h text height)
D1: Top Overlay "-" at 118.274,31.012 h1.52 r270; Top Overlay "+" at 118.401,33.552 h1.52 r270
D2: Top Overlay "-" at 101.714,31.012 h1.52 r270; Top Overlay "+" at 101.84,33.552 h1.52 r270
U2: Top Overlay "OUT-" at 83.676,18.725 h1.52; Top Overlay "IN+" at 47.608,32.441 h1.52; Top Overlay "IN-" at 47.608,18.852 h1.52; Top Overlay "OUT+" at 83.803,32.187 h1.52; Top Overlay "LM2596 DC-DC" at 60.689,16.82 h1.52